# EAGLE board USBPOVToy.v1b (EAGLE 5.11)
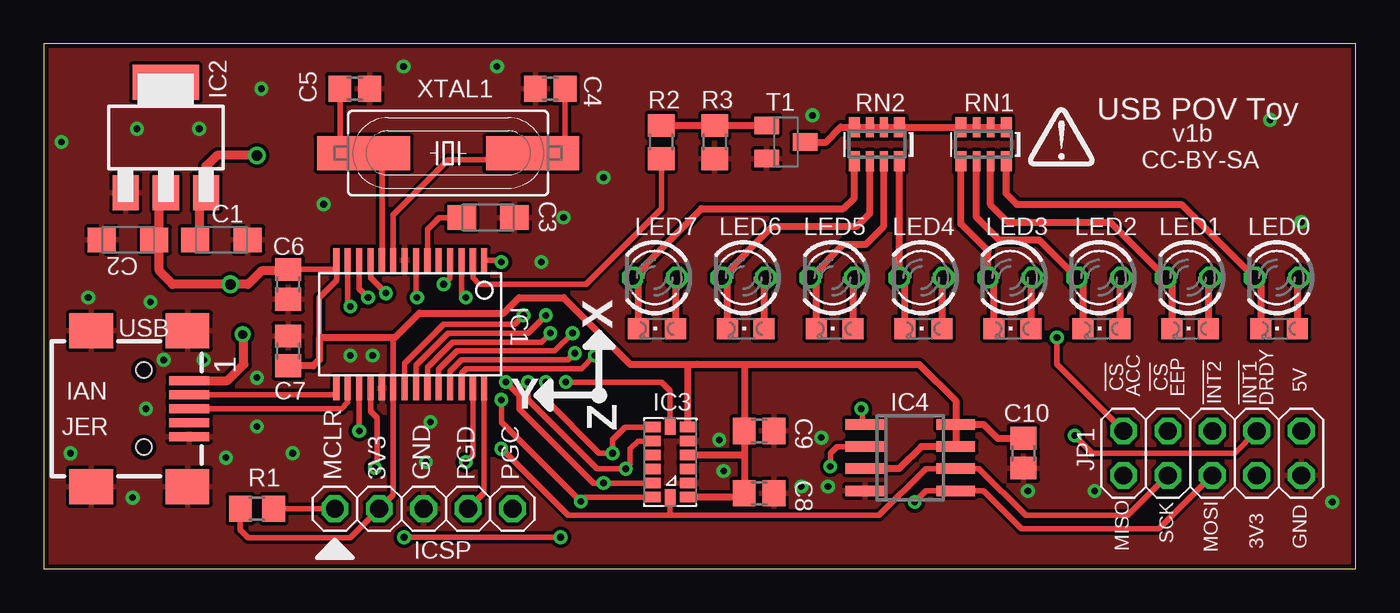
[diagram p0: board, top side]
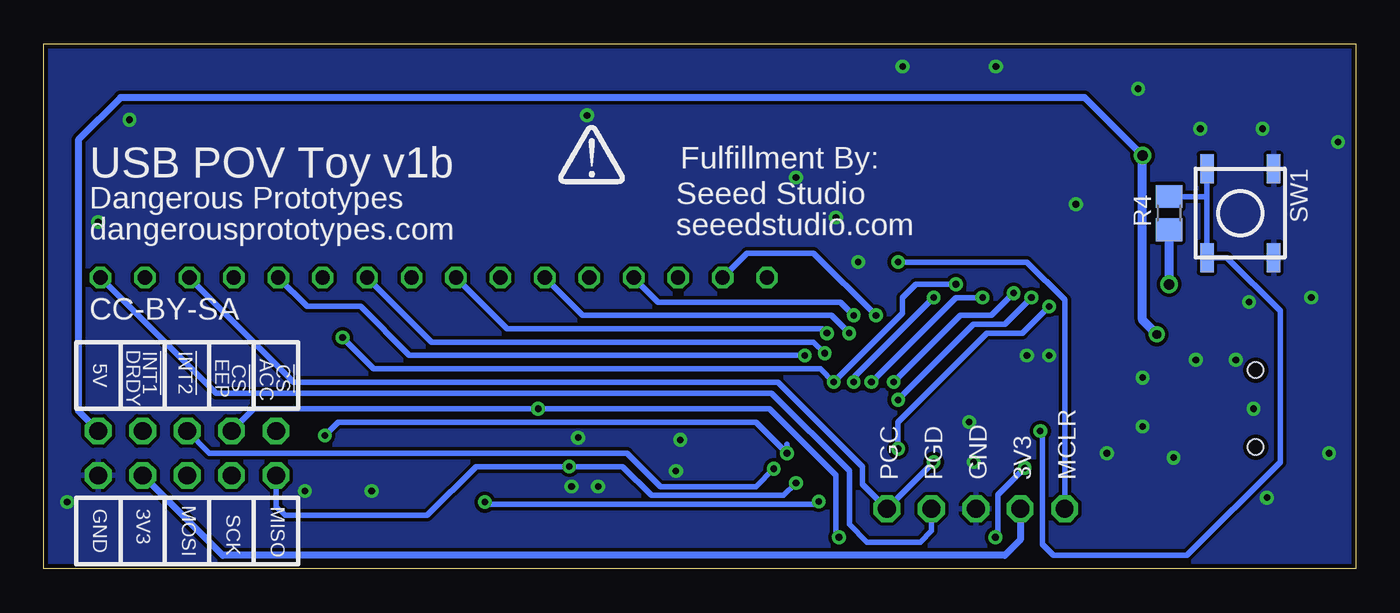
[diagram p1: board, bottom side, seen from below]

Size 75 x 30 mm. Coordinates in mm from the lower left corner, seen from the top.
Outline: 0,0 75,0 75,30 0,30 0,0
Copper layers (1*16): Top 0.035mm / dielectric 1.5mm / Bottom 0.035mm
Design rules "default *": minimum track width 12mil, minimum drill 15mil, track to track 8mil, track to pad 8mil, pad to pad 6mil, via to via 8mil, smd to smd 6mil, copper to edge 10mil, drill to drill 8mil, minimum pad ring 8mil, minimum via ring 8mil, stop-mask expansion 4mil, vias tented up to drill 25mil, thermal gap 8mil

## Footprints (pad centres in the part's own frame; a part is rotated, then mirrored left to right if it is on the bottom)
SMC_A = smd 1.6 x 1.4: + -1.5,0; - 1.5,0
C805 = smd 1.3 x 1.5: 1 -0.85,0; 2 0.85,0
SSOP28 = smd 0.348 x 1.397: 1 -4.225,-3.656; 2 -3.575,-3.656; 3 -2.925,-3.656; 4 -2.275,-3.656; 5 -1.625,-3.656; 6 -0.975,-3.656; 7 -0.325,-3.656; 8 0.325,-3.656; 9 0.975,-3.656; 10 1.625,-3.656; 11 2.275,-3.656; 12 2.925,-3.656; 13 3.575,-3.656; 14 4.225,-3.656; 15 4.225,3.656; 16 3.575,3.656; 17 2.925,3.656; 18 2.275,3.656; 19 1.625,3.656; 20 0.975,3.656; 21 0.325,3.656; 22 -0.325,3.656; 23 -0.975,3.656; 24 -1.625,3.656; 25 -2.275,3.656; 26 -2.925,3.656; 27 -3.575,3.656; 28 -4.225,3.656
SOT223 = smd 1.5 x 2: 1 -2.3,-3.15; 2 0,-3.15; 3 2.3,-3.15 | smd 3.8 x 2: 4 0,3.15
LGA-14 = smd 0.6 x 0.9: 1 -2,-1; 2 -1.2,-1; 3 -0.4,-1; 4 0.4,-1; 5 1.2,-1; 6 2,-1; 8 2,1; 9 1.2,1; 10 0.4,1; 11 -0.4,1; 12 -1.2,1; 13 -2,1 | smd 0.9 x 0.6: 7 2,0; 14 -2,0
SO-08 = smd 0.6 x 2.2: 1 -1.905,-2.6; 2 -0.635,-2.6; 3 0.635,-2.6; 4 1.905,-2.6; 5 1.905,2.6; 6 0.635,2.6; 7 -0.635,2.6; 8 -1.905,2.6
1X05 = drill 1.016 octagon: 1 -5.08,0; 2 -2.54,0; 3 0,0; 4 2.54,0; 5 5.08,0
2X05 = drill 1.016 octagon: 1 -5.08,-1.27; 2 -5.08,1.27; 3 -2.54,-1.27; 4 -2.54,1.27; 5 0,-1.27; 6 0,1.27; 7 2.54,-1.27; 8 2.54,1.27; 9 5.08,-1.27; 10 5.08,1.27
LED-3MM = drill 0.813 octagon: A -1.27,0; K 1.27,0
LED-805 = smd 1.2 x 1.2: A 0,-1.05; C 0,1.05
R805 = smd 1.3 x 1.5: 1 -0.95,0; 2 0.95,0
RN8P-4R-CRA06S = smd 0.63 x 1.15: 1 -1.295,-0.975; 4 1.295,-0.975; 5 1.295,0.975; 8 -1.295,0.975 | smd 0.44 x 1.15: 2 -0.4,-0.975; 3 0.4,-0.975; 6 0.4,0.975; 7 -0.4,0.975
TACT_SWITCH_SMALL = smd 1.651 x 0.762: 1 -2.54,1.905; 2 2.54,1.905; 3 -2.54,-1.905; 4 2.54,-1.905
SOT23-BEC = smd 1 x 1.4: B -0.95,-1.1; C 0,1.1; E 0.95,-1.1
CONN_USB_MINI-B = smd 2 x 2.5: BODY@1 -4.45,2.5; BODY@2 4.45,2.5; BODY@3 4.45,-3; BODY@4 -4.45,-3 | smd 0.5 x 2.3: D+ 0,2.6; D- -0.8,2.6; GND 1.6,2.6; P4 0.8,2.6; VUSB -1.6,2.6 | hole 0.9: -2.2,0; 2.2,0
HC-49U = smd 5.334 x 1.93: 1 -4.826,0; 2 4.826,0

## Placement (x,y rotation side)
C1  10uF  [SMC_A]  10.16,18.8 0 top
C2  10uF  [SMC_A]  4.83,18.8 180 top
C3  10uF  [SMC_A]  25.4,20.07 0 top
C4  [C805]  28.96,27.43 180 top
C5  [C805]  17.78,27.43 0 top
C6  0.47uF  [C805]  13.97,16.26 270 top
C7  0.1uF  [C805]  13.97,12.45 90 top
C8  0.1uF  [C805]  40.89,4.32 0 top
C9  0.1uF  [C805]  40.89,7.87 0 top
C10  0.1uF  [C805]  56.01,6.6 270 top
IC1  PIC18FJ2X50SSOP  [SSOP28]  20.95,13.97 180 top
IC2  [SOT223]  6.99,24.64 0 top
IC3  MMA7455L  [LGA-14]  35.81,6.1 90 top
IC4  25AA080SN  [SO-08]  49.53,6.35 270 top
ICSP  [1X05]  21.72,3.43 0 top
JP1  [2X05]  66.8,6.6 0 top
LED0  [LED-3MM]  70.48,16.64 180 top
LED1  [LED-3MM]  65.41,16.64 180 top
LED2  [LED-3MM]  60.33,16.64 180 top
LED3  [LED-3MM]  55.24,16.64 180 top
LED4  [LED-3MM]  50.16,16.64 180 top
LED5  [LED-3MM]  45.09,16.64 180 top
LED6  [LED-3MM]  40.01,16.64 180 top
LED7  [LED-3MM]  34.92,16.64 180 top
LED8  [LED-805]  35.05,13.72 90 top
LED9  [LED-805]  40.13,13.72 90 top
LED10  [LED-805]  45.21,13.72 90 top
LED11  [LED-805]  50.29,13.72 90 top
LED12  [LED-805]  55.37,13.72 90 top
LED13  [LED-805]  60.45,13.72 90 top
LED14  [LED-805]  65.53,13.72 90 top
LED15  [LED-805]  70.61,13.72 90 top
R1  10k  [R805]  12.19,3.43 180 top
R2  1k  [R805]  35.31,24.38 270 top
R3  10k  [R805]  38.35,24.38 270 top
R4  10k  [R805]  10.67,20.32 90 bottom
RN1  [RN8P-4R-CRA06S]  53.72,24.26 180 top
RN2  [RN8P-4R-CRA06S]  47.62,24.26 180 top
SW1  [TACT_SWITCH_SMALL]  6.6,20.32 270 bottom
T1  [SOT23-BEC]  42.42,24.38 270 top
U$1  [DP_LOGO]  58.17,23.62 0 top
U$2  [DP_LOGO]  43.69,22.61 0 bottom
USB  CONN_USB  [CONN_USB_MINI-B]  5.71,9.14 270 top
XTAL1  20MHz  [HC-49U]  23.11,23.75 180 top

## Library data of the parts
C1-C10 IC2 LED0 LED1-LED15 R1-R4 RN1 RN2 SW1 T1 U$1 U$2 USB XTAL1 = dp_devices
IC1 = dp_devices; PIC18FJ2X50: PIC18FJ2X50
IC3 = jer_eagle
IC4 = microchip
ICSP = pinhead - Copy
JP1 = pinhead

## Nets
!MCLR: IC1.1 ICSP.1 R1.1
+3V3: C2.+ C6.1 C7.1 C8.1 C9.1 C10.1 IC1.14 IC1.20 IC2.2 IC3.1 IC3.4 IC3.6 IC4.3 IC4.7 IC4.8 ICSP.2 JP1.7 R1.2 R4.1
+5V: C1.+ IC2.3 JP1.10 USB.VUSB
D+: IC1.16 USB.D+
D-: IC1.15 USB.D-
GND: C1.- C2.- C3.- C4.2 C5.2 C6.2 C7.2 C8.2 C9.2 C10.2 IC1.8 IC1.19 IC2.1 IC3.2 IC3.5 IC4.4 ICSP.3 JP1.9 R3.2 SW1.1 SW1.2 T1.E USB.BODY@1 USB.BODY@2 USB.BODY@3 USB.BODY@4 USB.GND
N$1: C4.1 IC1.9 XTAL1.1
N$2: LED0.K LED15.C RN1.8
N$3: LED1.K LED14.C RN1.7
N$4: LED2.K LED13.C RN1.6
N$5: LED3.K LED12.C RN1.5
N$6: LED4.K LED11.C RN2.8
N$7: LED5.K LED10.C RN2.7
N$8: LED6.K LED9.C RN2.6
N$9: LED7.K LED8.C RN2.5
N$10: C3.+ IC1.6
N$12: C5.1 IC1.10 XTAL1.2
N$17: RN1.1 RN1.2 RN1.3 RN1.4 RN2.1 RN2.2 RN2.3 RN2.4 T1.C
N$18: R2.1 R3.1 T1.B
RA0: IC1.2 R2.2
RA1: IC1.3 IC3.8 JP1.8
RA2: IC1.4 IC3.7 JP1.2
RA3: IC1.5
RA5: IC1.7 IC3.9 JP1.6
RB0: IC1.21 LED7.A LED8.A
RB1: IC1.22 LED6.A LED9.A
RB2: IC1.23 LED5.A LED10.A
RB3: IC1.24 LED4.A LED11.A
RB4: IC1.25 LED3.A LED12.A
RB5: IC1.26 LED2.A LED13.A
RB6: IC1.27 ICSP.5 LED1.A LED14.A
RB7: IC1.28 ICSP.4 LED0.A LED15.A
RC0: IC1.11 IC3.12 IC4.2 JP1.1
RC1: IC1.12 IC3.13 IC4.5 JP1.5
RC2: IC1.13 IC3.14 IC4.6 JP1.3
RC6: IC1.17 R4.2 SW1.3 SW1.4
RC7: IC1.18 IC4.1 JP1.4

## Tracks (layer width: path | path; a pad name or v marks a point on that pad's centre or on a via)
!MCLR  (via drill 0.38)
  Top 0.305: R1.1 ICSP.1 | v26.16,17.53 26.06,17.63 IC1.1
  Bottom 0.305: v26.16,17.53 18.8,17.53 16.64,15.37 ICSP.1
+3V3  (via drill 0.6)
  Top 0.305: 11.24,3.49 R1.2 11.24,2.22 11.68,1.78 17.53,1.78 ICSP.2 19.98,4.23 IC1.20 19.98,13.12 20.07,13.21 | 16.73,17.02 16.73,16.48 15.75,15.49 15.75,12.7 | 16.73,17.02 IC1.14 | C6.1 16.64,17.11 16.73,17.02
  Top 0.406: C7.1 15.41,11.6 15.75,11.94 15.75,12.7 15.75,13.21 20.07,13.21 21.46,14.61 26.29,14.61 27.18,15.49 29.72,15.49 33.53,11.68 37.34,11.68 | IC4.8 IC4.7 50.16,6.99 48.9,5.71 IC4.3 | C10.1 54.52,7.45 53.72,8.26 IC4.8 | 37.34,11.68 40.01,11.68 | IC3.6 36.81,11.67 37.34,11.68 | 40.01,11.68 40.04,11.6 C9.1 40.04,6.35 | 40.04,6.35 C8.1 39.82,4.1 IC3.1 | IC3.4 39.9,6.5 40.04,6.35 | 40.01,11.68 50.04,11.68 52.13,9.59 IC4.8
  Top 0.508: IC2.2 6.76,21.49 6.6,21.34 6.6,19.33 6.46,19.19 | 6.46,19.19 C2.+ 6.1,18.77 | 6.46,19.19 6.6,19.05 6.6,17.02 7.37,16.26 v10.67,16.26 11.68,16.26 12.45,17.02 13.88,17.02 C6.1
  Bottom 0.406: JP1.7 64.77,0.76 20.07,0.76 19.18,1.65 ICSP.2
  Bottom 0.508: v10.67,16.26 R4.1
+5V  (via drill 0.51, 0.6)
  Top 0.508: C1.+ 8.89,19.03 8.89,21.34 9.04,21.49 IC2.3 9.29,23 9.91,23.62 v12.19,23.62 | USB.VUSB 10.49,10.74 11.43,11.68 11.43,13.34 v11.38,13.39
  Bottom 0.406: v12.19,23.62 15.49,26.92 70.61,26.92 73.03,24.51 73.03,9.02 JP1.10
  Bottom 0.508: v11.38,13.39 11.89,13.92 12.19,14.22 v12.19,23.62
D+
  Top 0.305: USB.D+ 17.02,9.14 17.38,9.51 IC1.16
D-
  Top 0.305: IC1.15 16.73,10.04 16.74,10.03 16.65,9.94 USB.D-
GND  (via drill 0.38)
  other vias: 38.61,7.37 38.86,5.59 44.45,7.49 17.53,12.19 5.08,4.06 1.52,6.6 1.02,24.38 18.8,12.19 10.41,6.35 9.14,11.94 73.66,3.81 29.72,20.07 56.26,4.45 60.07,4.45 43.31,4.7 44.83,4.7 70.1,25.65 71.88,19.81 43.94,25.91 5.84,9.14 6.86,11.94 2.54,15.49 8.89,25.15 5.33,25.15 12.45,27.43 28.45,17.53 32,22.35 16,20.83 20.57,28.7 25.91,28.7 6.1,15.24 12.19,10.92 14.22,6.6 12.19,8.13 22.1,8.38 21.84,6.1
  pour Top: 0,0 75,0 75,30 0,30
  pour Bottom: 0,0 75,0 75,30 0,30
N$1
  Top 0.305: C4.1 29.81,24.22 29.72,24.13 28.32,24.13 XTAL1.1 27.56,23.37 23.11,23.37 19.98,20.23 IC1.9
N$2
  Top 0.406: LED15.C 69.56,16.29 LED0.K 68.07,17.78 66.29,19.56 65.02,20.83 55.63,20.83 55.02,21.44 RN1.8
N$3
  Top 0.406: LED14.C 64.48,16.29 LED1.K 60.96,19.81 55.12,19.81 54.12,20.81 RN1.7
N$4
  Top 0.406: LED13.C 59.4,16.29 LED2.K 56.9,18.8 54.61,18.8 53.32,20.09 RN1.6
N$5
  Top 0.406: LED12.C 54.32,16.29 LED3.K 53.98,18.16 52.43,19.71 RN1.5
N$6
  Top 0.406: LED11.C 49.24,16.29 LED4.K 48.92,16.66 RN2.8
N$7
  Top 0.406: LED10.C 44.16,16.29 LED5.K 45.72,18.54 46.99,18.54 48.02,19.58 RN2.7
N$8
  Top 0.406: LED9.C 39.08,16.29 LED6.K 41.66,19.56 46.48,19.56 47.23,20.3 RN2.6
N$9
  Top 0.406: LED8.C 34,16.29 LED7.K 37.59,20.57 45.72,20.57 46.33,21.18 RN2.5
N$10
  Top 0.305: IC1.6 21.93,19.39 22.61,20.07 C3.+
N$12
  Top 0.305: C5.1 16.93,23.71 17.02,23.62 18.16,23.62 XTAL1.2 18.41,23.62 19.3,23.62 19.33,23.6 IC1.10
N$17
  Top 0.406: T1.C 44.7,24.38 45.55,25.23 RN2.4 RN2.3 RN2.2 RN2.1 RN1.4 RN1.3 RN1.2 RN1.1
N$18
  Top 0.406: T1.B R3.1 R2.1
RA0
  Top 0.305: IC1.2 24.53,16.62 24.89,16.26 30.99,16.26 35.31,20.57 R2.2
RA1  (via drill 0.38)
  Top 0.305: v24.13,15.49 23.88,15.75 IC1.3 | JP1.8 68.07,6.6 59.94,6.6 v58.93,7.62 | v28.7,10.67 28.7,9.65 31.75,6.6 v32.51,6.6 32.51,7.37 33.24,8.1 IC3.8
  Bottom 0.305: v28.7,10.67 28.7,10.92 v24.13,15.49 | 32.51,7.11 v32.51,6.6 34.29,8.38 58.17,8.38 v58.93,7.62
RA2  (via drill 0.38)
  Top 0.305: IC1.4 23.23,16.63 v22.86,16.26 | v29.84,10.67 35.31,10.67 35.81,10.16 IC3.7 | v57.91,13.21 57.91,11.68 JP1.2
  Bottom 0.305: v22.86,16.26 25.15,16.26 25.91,15.49 25.91,14.61 v29.84,10.67 30.61,11.43 56.13,11.43 v57.91,13.21
RA5  (via drill 0.38)
  Top 0.305: IC1.7 21.28,15.55 v21.34,15.49 | IC3.9 33.97,7.3 33.53,6.86 33.53,5.97 v33.27,5.71 31.62,5.71 27.69,9.65 v27.69,10.67
  Bottom 0.305: v21.34,15.49 22.86,15.49 v27.69,10.67 | v33.27,5.71 34.29,4.7 39.75,4.7 41.66,6.6 65.53,6.6 JP1.6
RB0  (via drill 0.38)
  Top 0.305: IC1.21 20.63,11.74 22.86,13.97 26.92,13.97 v27.43,14.48
  Top 0.406: LED8.A 36.1,16.54 LED7.A
  Bottom 0.305: LED7.A 34.8,18.03 30.99,18.03 v27.43,14.48
RB1  (via drill 0.38)
  Top 0.305: IC1.22 21.28,11.63 23.11,13.46 27.69,13.46 v28.7,14.48
  Top 0.406: LED9.A 41.18,16.54 LED6.A
  Bottom 0.305: v28.7,14.48 29.46,15.24 39.88,15.24 LED6.A
RB2  (via drill 0.38)
  Top 0.305: IC1.23 21.93,11.52 23.37,12.95 28.45,12.95 v28.96,13.46
  Top 0.406: LED10.A 46.26,16.54 LED5.A
  Bottom 0.305: v28.96,13.46 29.97,14.48 44.2,14.48 LED5.A
RB3  (via drill 0.38)
  Top 0.305: IC1.24 22.58,11.4 23.62,12.45 29.21,12.45 v30.23,13.46
  Top 0.406: LED11.A 51.34,16.54 LED4.A
  Bottom 0.305: LED4.A 48.51,13.72 30.48,13.72 v30.23,13.46
RB4  (via drill 0.38)
  Top 0.305: IC1.25 23.23,11.29 23.88,11.94 29.97,11.94 v30.35,12.32
  Top 0.406: LED12.A 56.42,16.54 LED3.A
  Bottom 0.305: v30.35,12.32 30.99,12.95 52.83,12.95 LED3.A
RB5  (via drill 0.38)
  Top 0.305: IC1.26 23.88,11.18 24.13,11.43 30.73,11.43 v31.5,12.19
  Top 0.406: LED13.A 61.5,16.54 LED2.A
  Bottom 0.305: LED2.A 59.94,14.99 56.9,14.99 54.1,12.19 v31.5,12.19
RB6  (via drill 0.38)
  Top 0.305: IC1.27 24.53,6.5 v24.13,6.1
  Top 0.406: LED14.A 66.58,16.54 LED1.A
  Bottom 0.305: LED1.A 60.71,10.67 33.02,10.67 28.19,5.84 28.19,4.83 ICSP.5 v24.13,6.1
RB7
  Top 0.305: IC1.28 25.18,4.35 ICSP.4
  Top 0.406: LED15.A 71.66,16.54 LED0.A
  Bottom 0.305: LED0.A 65.15,10.03 33.4,10.03 28.96,5.59 28.96,2.54 27.94,1.52 24.89,1.52 24.26,2.16 ICSP.4
RC0  (via drill 0.38)
  Top 0.305: v19.56,15.75 18.68,16.63 IC1.11 | IC3.12 v32,4.9 31.43,4.9 27.18,9.14 27.18,9.91 v26.42,10.67 | v44.96,5.84 44.96,6.6 45.34,6.99 IC4.2
  Bottom 0.305: v19.56,15.75 20.83,14.48 22.61,14.48 v26.42,10.67 | v32,4.9 32.71,4.19 40.26,4.19 41.91,5.84 v44.96,5.84 50.29,5.84 53.09,3.05 61.21,3.05 61.72,3.56 JP1.1
RC1  (via drill 0.38)
  Top 0.305: v18.54,15.49 18.03,16.01 IC1.12 | v49.78,3.81 50.42,4.45 IC4.5 53.72,4.45 55.88,2.29 63.75,2.29 JP1.5 | IC3.13 30.96,4.1 v30.7,3.84 26.16,8.38 v26.16,9.65
  Bottom 0.305: v18.54,15.49 20.07,13.97 21.84,13.97 v26.16,9.65 | v30.7,3.84 30.86,3.68 49.66,3.68 v49.78,3.81
RC2  (via drill 0.38)
  Top 0.305: v26.16,6.86 29.97,3.05 35.81,3.05 | v17.53,14.99 17.38,15.09 IC1.13 | 35.81,3.05 47.75,3.05 50.42,5.71 IC4.6 53.47,5.71 56.13,3.05 61.98,3.05 JP1.3 | 35.81,3.05 IC3.14
  Bottom 0.305: v17.53,14.99 19.05,13.46 21.08,13.46 26.16,8.38 v26.16,6.86
RC6  (via drill 0.38)
  Top 0.305: IC1.17 v18.03,7.88 v18.03,7.87
  Bottom 0.305: 8.51,21.34 SW1.4 7.37,17.78 4.32,14.73 4.32,6.1 9.65,0.76 17.27,0.76 17.91,1.4 17.91,7.75 v18.03,7.87 | 8.51,21.34 SW1.3 | R4.2 8.57,21.27 8.51,21.34
RC7  (via drill 0.38)
  Top 0.305: IC1.18 18.69,10.31 18.69,8.99 19.05,8.64 19.05,5.89 v18.92,5.77 | IC4.1 46.91,8.26 46.79,8.38 46.79,9.09 v46.74,9.14 | v29.54,1.8 29.52,1.78 29.49,1.8 v20.6,1.8
  Bottom 0.305: v29.54,1.8 29.72,1.98 29.72,5.33 33.53,9.14 v46.74,9.14 62.99,9.14 JP1.4 | v18.92,5.77 20.45,4.24 20.45,1.91 20.55,1.8 v20.6,1.8

## Text on the board
tNames: USB POV Toy | v1b | CC-BY-SA | X | IAN | !CS | ACC | !CS | EEP | 5V | Y | !INT2 | !INT1 | DRDY | JER | Z | MCLR | 3V3 | GND | PGD | PGC | MISO | SCK | MOSI | 3V3 | GND
bNames: Fulfillment By: | USB POV Toy v1b | Seeed Studio | Dangerous Prototypes | seeedstudio.com | dangerousprototypes.com | CC-BY-SA | DRDY | !CS | ACC | !CS | EEP | !INT2 | !INT1 | 5V | MCLR | 3V3 | GND | PGD | PGC | MISO | MOSI | SCK | 3V3 | GND